# Altium PCB PCB1.PcbDoc
Units mm, origin at the board's own origin, x right, y up, seen from the top; angles counter-clockwise.
Board outline 71 x 55 mm, 2 copper layers (Top Layer, Bottom Layer); 14 components, 33 nets, 93 pads, 7 vias.
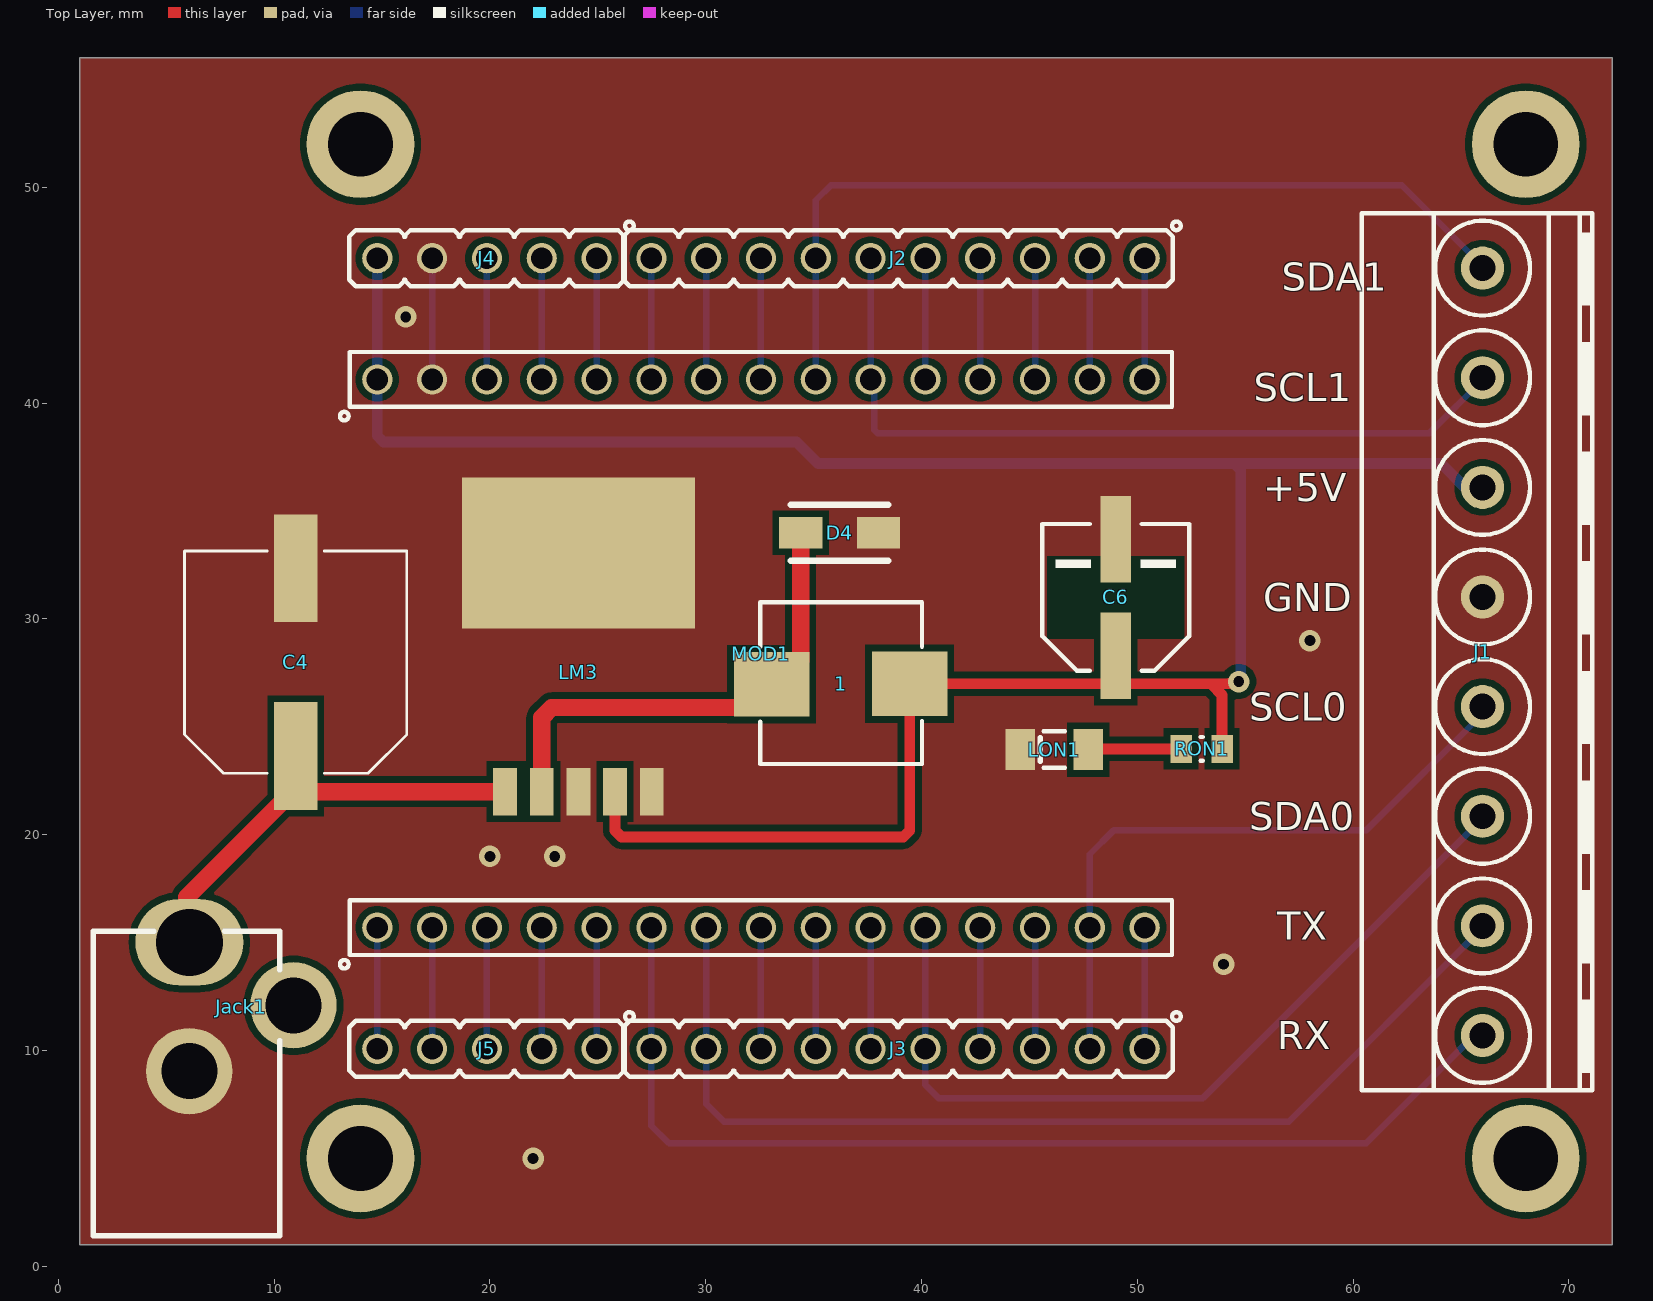
[diagram p0: Top Layer view]
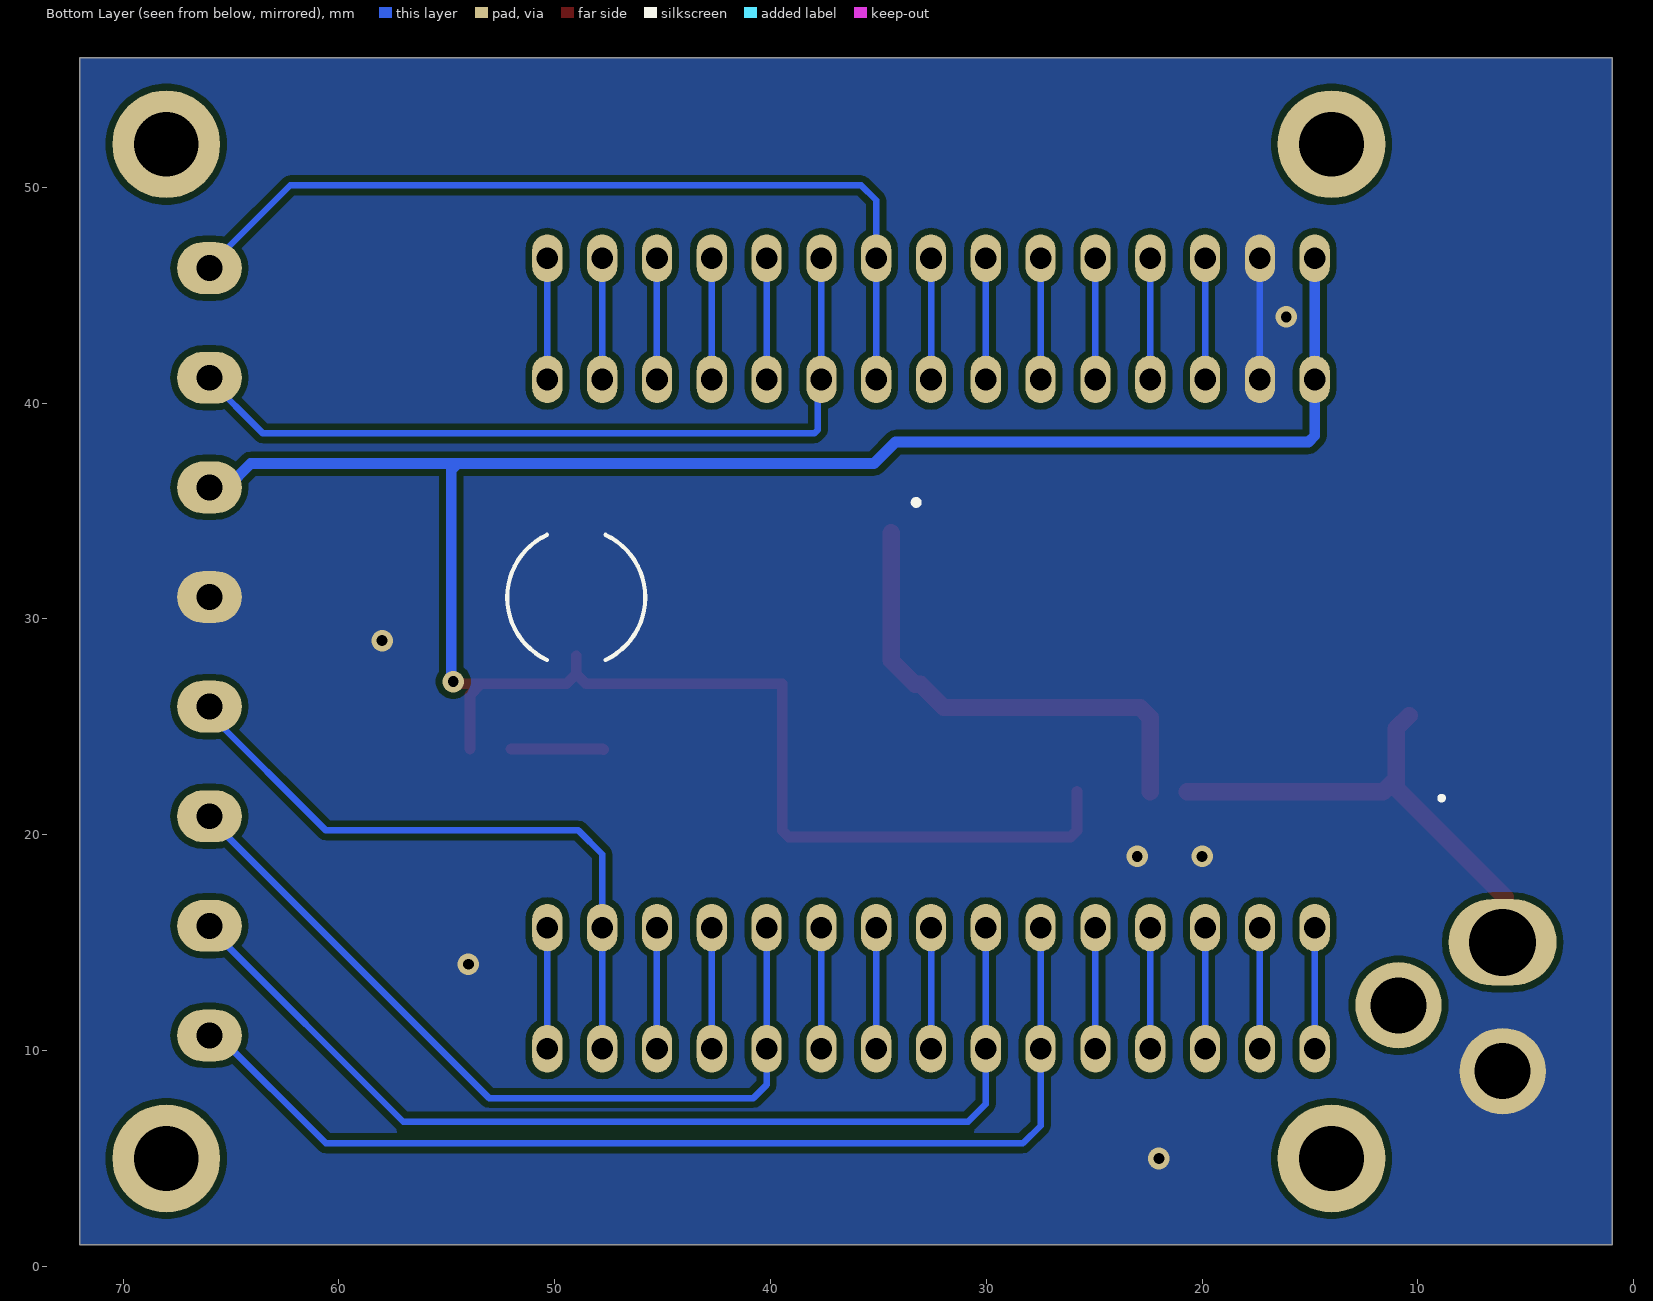
[diagram p1: Bottom Layer view, seen from below]

## Layer stack, top to bottom
Top Solder: solder mask 0.0102, Solder Resist, Dk 3.5
Top Layer: signal copper 0.0356
Dielectric 1: dielectric 0.32, FR-4, Dk 4.8
Bottom Layer: signal copper 0.0356
Bottom Solder: solder mask 0.0102, Solder Resist, Dk 3.5

## Board outline
1,1 1,56 72,56 72,1

## Design rules (kind name [scope] priority, off if disabled: settings)
Clearance [All] p1: gap=0.3 ignorepadtopadclearanceinfootprint=FALSE except(0: Arc-Hole Track-Hole SMDPad-Hole THPad-Hole Via-Hole Fill-Hole Poly-Hole Region-Hole Text-Hole)
PolygonConnect [InNet('GND')] p1: connectstyle=Direct reliefconductorwidth=0.254 reliefentries=4 polygonreliefangle="90 Angle" airgapwidth=0.254
RoutingVias [All] p1: holewidth=0.711 width=1.27 viastyle="Through Hole" minholewidth=0.711 minwidth=1.27 maxholewidth=0.711 maxwidth=1.27
SolderMaskExpansion [All] p1: expansion=0.102 istentingtop=FALSE
Width [All] p1: maxlimit=0.8 minlimit=0.3 preferedwidth=0.5
30 further rules are at their usual default settings.

## Components (designator, comment, footprint, x,y, rotation, side; value= is the part's Value field where it differs from the comment)
1 "Inductor b1" CYH74-33UH 36.3,27 r180 top value=33uH
C4 "=VALUE" CAP_EEEFK1E681SP 11,28 r90 top
C6 "=VALUE" RVT220UF16V67RV0015 49,31 r90 top
D4 "Diodo Schottky" DO-214AC-2 36.2,34 r0 top
J1 "CONN_TB8" TBG_8 66,28.48 r270 top
J2 "HDR1X10" HDR_M_1X10 38.91,46.72 r180 top value=?
J3 "HDR1X10" HDR_M_1X10 38.91,10.08 r180 top value=?
J4 "HDR1X5" HDR_M_1X5 19.86,46.72 r180 top value=?
J5 "HDR1X5" HDR_M_1X5 19.86,10.08 r180 top value=?
Jack1 "Conector" "Conector JACK" 6.6,8.6 r90 top
LM3 "LM2596" LM2596 20.7,22 r90 top
LON1 "Led1206" LED1206 46,24 r180 top
MOD1 "ESP32 DEVKITV1" HDR_F_1X15 32.56,41.1 r270 top
RON1 "Res 5k" "RES 0805 - 5k" 53,24 r0 top

## Footprints (in the part's own frame and the unit in brackets; to place one, negate y for a bottom-side part, rotate by r counter-clockwise, add the part's x,y. Pads: shape width x height; smd on the part's side, far side on the other; paste and mask are expansions set on the pad)
CAP_EEEFK1E681SP [mm]
  rect 5x2 smd: 1(-4.35,0) 2(4.35,0)
  silkscreen extent -5.15,-5.15 5.15,5.15, body extent -5.85,-5.15 5.85,5.15, height 9.3
"Conector JACK" [mm]
  oval 4x5 hole 3.1: 1(6.417,0.531)
  round 4 hole 2.6: 2(0.448,0.531) 3(3.496,-4.295)
  silkscreen extent -7.17,-3.66 6.93,4.98, body extent -7.26,-4.47 7.14,5.03, height 11
CYH74-33UH [mm]
  rect 3.5x3 smd: 1(3.25,0.02) 2(-3.15,0)
  silkscreen extent -3.72,-3.78 3.78,3.72, body extent -3.82,-3.78 3.88,3.72, height 4.6
DO-214AC-2 [mm]
  rect 2x1.45 smd: 1(-1.8,0) 2(1.8,0)
  silkscreen extent -2.25,-1.3 2.25,1.3, body extent -2.47,-1.3 2.47,1.3, height 2
HDR_F_1X15 [mm] "Connector; Header; 15 Position"
  round 1.4 / inner round 1.4 / far side oval 2.2x1.4 hole 1: 1(0,17.78) 2(0,15.24) 3(0,12.7) 4(0,10.16) 5(0,7.62) 6(0,5.08) 7(0,2.54) 8(0,0) 9(0,-2.54) 10(0,-5.08) 11(0,-7.62) 12(0,-10.16) 13(0,-12.7) 14(0,-15.24) 15(0,-17.78) 16(25.4,-17.78) 17(25.4,-15.24) 18(25.4,-12.7) 19(25.4,-10.16) 20(25.4,-7.62) 21(25.4,-5.08) 22(25.4,-2.54) 23(25.4,0) 24(25.4,2.54) 25(25.4,5.08) 26(25.4,7.62) 27(25.4,10.16) 28(25.4,12.7) 29(25.4,15.24) 30(25.4,17.78)
  silkscreen extent -1.27,-19.51 27.3,19.05, body extent -1.4,-27.55 26.75,23.95, height 15.47
HDR_M_1X5 [mm] "Connector; Header; 5 Position"
  round 1.4 / inner round 1.4 / far side oval 1.4x2.2 hole 1 mask+0.1: 1(-5.08,0) 2(-2.54,0) 3(0,0) 4(2.54,0) 5(5.08,0)
  silkscreen extent -6.8,-1.7 6.38,1.3, body extent -6.35,-1.27 6.35,1.27, height 8.54
HDR_M_1X10 [mm] "Connector; Header; 10 Position"
  round 1.4 / inner round 1.4 / far side oval 1.4x2.2 hole 1 mask+0.1: 1(-11.43,0) 2(-8.89,0) 3(-6.35,0) 4(-3.81,0) 5(-1.27,0) 6(1.27,0) 7(3.81,0) 8(6.35,0) 9(8.89,0) 10(11.43,0)
  silkscreen extent -13.1,-1.7 12.73,1.3, body extent -12.7,-1.3 12.7,1.19, height 8.54
LED1206 [mm]
  rect 1.35x1.9 smd: 1(-1.725,0.05) 2(1.425,0.05)
  silkscreen extent -0.65,-0.8 0.5,0.9, body extent -1.85,-0.85 1.55,0.95, height 1.1
LM2596 [mm]
  rect 2.2x1.1 smd: 1(0,0) 2(0,-1.7) 3(0,-3.4) 4(0,-5.1) 5(0,-6.8)
  rect 7x10.8 smd: 3(11.05,-3.4)
  body extent 0.23,-8.61 14.6,1.81, height 4.65
"RES 0805 - 5k" [mm]
  rect 1x1.3 smd: 1(-0.973,-0.019) 2(0.927,-0.019)
  silkscreen extent -0.07,-0.57 0.03,0.53, body extent -1.01,-0.62 0.99,0.58, height 0.46
RVT220UF16V67RV0015 [mm]
  rect 4x1.4 smd: 1(-2.7,0) 2(2.7,0)
  Top Layer pour cut-out: 1.905,3.175 1.905,-3.175 -1.905,-3.175 -1.905,3.175
  silkscreen extent -3.4,-3.4 3.4,3.4, body extent -3.65,-3.3 3.65,3.3, height 7.7
TBG_8 [mm] "Terminal Block Green"
  round 2 / inner round 2 / far side oval 2.4x3 hole 1.2: 1(-17.78,0) 2(-12.7,0) 3(-7.62,0) 4(-2.54,0) 5(2.54,0) 6(7.62,0) 7(12.7,0) 8(17.78,0)
  silkscreen extent -20.32,-5.6 20.32,5.08, body extent -20.24,-5.5 20.2,5, height 14.1

## Part data
1: library part Inductor, "Inductor", Code_IEC=1005, Code_JEITA=0402, LatestRevisionDate=29-May-2009, LatestRevisionNote="IPC-7351 Footprint Added.", PackageDescription="Chip Inductor", PackageReference=0402-A, Published=8-Jun-2000, Publisher="Altium Limited"
C4: library part CAP_SMD_EL_330u25V, "Capacitor;  Alum Electrolytic;  Cap 330 uF;  Tol 20%;  Vol-Rtg 25 VDC;  SMT;  8x10.5;  CT", Capacitance=680uF, Case/Package=Radial, Leakage Current=3uA, Manufacturer=Panasonic, Manufacturer Part Number=EEE-1EA331UP, Max Operating Temperature=85°C, Min Operating Temperature=-40°C, Package Quantity=1, Ripple Current=270mA, Tolerance=20%, Voltage=25V, Category="Aluminum Electrolytic Capacitors", ComponentLink1Description=https://datasheet.ciiva.com/24070/aba0000ce2-40801-24070005.pdf?src-supplier=Mouser, ComponentLink1URL=https://datasheet.ciiva.com/24070/aba0000ce2-40801-24070005.pdf?src-supplier=Mouser, ComponentLink2Description=https://datasheet.ciiva.com/46378/aba0000ce2-46378294.pdf?src-supplier=Element14, ComponentLink2URL=https://datasheet.ciiva.com/46378/aba0000ce2-46378294.pdf?src-supplier=Element14, ComponentLink3Description=https://datasheet.ciiva.com/30071/11aba0000ce2-30071959.pdf?src-supplier=Onlinecomponents.com, ComponentLink3URL=https://datasheet.ciiva.com/30071/11aba0000ce2-30071959.pdf?src-supplier=Onlinecomponents.com, ComponentLink4Description=https://datasheet.ciiva.com/31414/aba0000ce2-31414664.pdf?src-supplier=Farnell, ComponentLink4URL=https://datasheet.ciiva.com/31414/aba0000ce2-31414664.pdf?src-supplier=Farnell, ComponentLink5Description=https://datasheet.ciiva.com/46374/aba0000ce2-46374392.pdf?src-supplier=Element14, ComponentLink5URL=https://datasheet.ciiva.com/46374/aba0000ce2-46374392.pdf?src-supplier=Element14, ComponentLink6Description=https://datasheet.ciiva.com/16397/aba0000ce2-16397068.pdf?src-supplier=Future+Electronics, ComponentLink6URL=https://datasheet.ciiva.com/16397/aba0000ce2-16397068.pdf?src-supplier=Future+Electronics, ComponentLink7Description=https://datasheet.ciiva.com/17535/aba0000ce2-17535308.pdf?src-supplier=Avnet+Europe, ComponentLink7URL=https://datasheet.ciiva.com/17535/aba0000ce2-17535308.pdf?src-supplier=Avnet+Europe, ComponentLink8Description=https://datasheet.ciiva.com/2985/aba0000ce2-2985133.pdf?src-supplier=Avnet, ComponentLink8URL=https://datasheet.ciiva.com/2985/aba0000ce2-2985133.pdf?src-supplier=Avnet, ComponentLink9Description=https://datasheet.ciiva.com/14610/70255710-14610287.pdf?src-supplier=Allied+Electronics, ComponentLink9URL=https://datasheet.ciiva.com/14610/70255710-14610287.pdf?src-supplier=Allied+Electronics, Contact Plating=Tin, Diameter=8mm, Height=10.2mm, Height - Seated (Max)=0.402inch, Lead Free="Lead Free", Length=10.5mm, Life (Hours)=2000Hour, Mount="Surface Mount,PCB", Packaging="Tape and Reel", Pricing 1="500=0.19230, 1000=0.14820, 2500=0.14670, 10000=0.14520, 25000=0.14380, 50000=0.14230 (USD)", Radiation Hardening=No, REACH SVHC="No SVHC", Ripple Current (AC)=270mA, RoHS=Yes, Stock 1=7000, Supplier 1="Arrow Electronics", Supplier Part Number 1=EEE-1EA331UP, Termination=SMD/SMT, Voltage Rating=25V, Voltage Rating (DC)=25V
C6: library part CAP_SMD_EL_330u25V, "Capacitor;  Alum Electrolytic;  Cap 330 uF;  Tol 20%;  Vol-Rtg 25 VDC;  SMT;  8x10.5;  CT", Capacitance=220uF, Case/Package=Radial, Leakage Current=3uA, Manufacturer=Panasonic, Manufacturer Part Number=EEE-1EA331UP, Max Operating Temperature=85°C, Min Operating Temperature=-40°C, Package Quantity=1, Ripple Current=270mA, Tolerance=20%, Voltage=25V, Category="Aluminum Electrolytic Capacitors", ComponentLink1Description=https://datasheet.ciiva.com/24070/aba0000ce2-40801-24070005.pdf?src-supplier=Mouser, ComponentLink1URL=https://datasheet.ciiva.com/24070/aba0000ce2-40801-24070005.pdf?src-supplier=Mouser, ComponentLink2Description=https://datasheet.ciiva.com/46378/aba0000ce2-46378294.pdf?src-supplier=Element14, ComponentLink2URL=https://datasheet.ciiva.com/46378/aba0000ce2-46378294.pdf?src-supplier=Element14, ComponentLink3Description=https://datasheet.ciiva.com/30071/11aba0000ce2-30071959.pdf?src-supplier=Onlinecomponents.com, ComponentLink3URL=https://datasheet.ciiva.com/30071/11aba0000ce2-30071959.pdf?src-supplier=Onlinecomponents.com, ComponentLink4Description=https://datasheet.ciiva.com/31414/aba0000ce2-31414664.pdf?src-supplier=Farnell, ComponentLink4URL=https://datasheet.ciiva.com/31414/aba0000ce2-31414664.pdf?src-supplier=Farnell, ComponentLink5Description=https://datasheet.ciiva.com/46374/aba0000ce2-46374392.pdf?src-supplier=Element14, ComponentLink5URL=https://datasheet.ciiva.com/46374/aba0000ce2-46374392.pdf?src-supplier=Element14, ComponentLink6Description=https://datasheet.ciiva.com/16397/aba0000ce2-16397068.pdf?src-supplier=Future+Electronics, ComponentLink6URL=https://datasheet.ciiva.com/16397/aba0000ce2-16397068.pdf?src-supplier=Future+Electronics, ComponentLink7Description=https://datasheet.ciiva.com/17535/aba0000ce2-17535308.pdf?src-supplier=Avnet+Europe, ComponentLink7URL=https://datasheet.ciiva.com/17535/aba0000ce2-17535308.pdf?src-supplier=Avnet+Europe, ComponentLink8Description=https://datasheet.ciiva.com/2985/aba0000ce2-2985133.pdf?src-supplier=Avnet, ComponentLink8URL=https://datasheet.ciiva.com/2985/aba0000ce2-2985133.pdf?src-supplier=Avnet, ComponentLink9Description=https://datasheet.ciiva.com/14610/70255710-14610287.pdf?src-supplier=Allied+Electronics, ComponentLink9URL=https://datasheet.ciiva.com/14610/70255710-14610287.pdf?src-supplier=Allied+Electronics, Contact Plating=Tin, Diameter=8mm, Height=10.2mm, Height - Seated (Max)=0.402inch, Lead Free="Lead Free", Length=10.5mm, Life (Hours)=2000Hour, Mount="Surface Mount,PCB", Packaging="Tape and Reel", Pricing 1="500=0.19230, 1000=0.14820, 2500=0.14670, 10000=0.14520, 25000=0.14380, 50000=0.14230 (USD)", Radiation Hardening=No, REACH SVHC="No SVHC", Ripple Current (AC)=270mA, RoHS=Yes, Stock 1=7000, Supplier 1="Arrow Electronics", Supplier Part Number 1=EEE-1EA331UP, Termination=SMD/SMT, Voltage Rating=25V, Voltage Rating (DC)=25V
J1: library part "Bloque Terminal 8", "CONN, TERMINAL BLOCK, 5.08mm pitch"
J2 J3: library part "Header Male THT 1x10", "CONN, HEADER, Male, pitch: 2.54mm, 10POS", Manufacturer=?, Huella=?, Link_Supplier=?, Manufacturer Part=?, Price=?, Supplier=?, Supplier Part=?
J4 J5: library part "Header Male THT 1x5", "CONN, HEADER, Male, pitch: 2.54mm, 5POS", Manufacturer=?, Huella=?, Link_Supplier=?, Manufacturer Part=?, Price=?, Supplier=?, Supplier Part=?
LON1: "NCD1206R1"
RON1: "ARG05DTC5001"

## Free pads (board coordinates)
  round 5 hole 3: 27(14,5) 27(14,52) 27(68,5) 27(68,52)

## Via types
v1: diameter 1, hole 0.5, Top Layer to Bottom Layer, 7 vias

## Nets (pads, with @x,y where several pads share a name; then routed paths per layer and width w, separated by ;. In a path a pad name is that pad's centre, name@x,y a point inside that pad or via, vN(x,y) a via of type N, cw(c..) or ccw(c..) an arc to the next point about the centre after c; other vN are vias at no path point)
+5v: 1.2 C6.1 J1.3 J4.5 LM3.4 MOD1.15 RON1.2 | length 112.9
  Top Layer w0.5: LM3.4 25.8,20.193 26.093,19.9 39.157,19.9 39.45,20.193 1.2 48.55,27 C6.1@49,27.45 ; C6.1 C6.1@49,27.45 ; C6.1@49.415,27.035 C6.1@49,27.45 ; C6.1@49.45,27 54.246,27 54.251,27.004 54.604,27.004 v1(54.7,27.1) ; 53.457,26.95 53.927,26.48 RON1.2
  Bottom Layer w0.5: J4.5@14.719,46.781 J4.5 MOD1.15 14.78,38.493 15.073,38.2 34.2,38.2 35.2,37.2 54.503,37.2 ; v1(54.7,27.1) 54.796,27.196 54.796,36.907 54.503,37.2 ; J1.3 65.186,36.1 64.086,37.2 54.503,37.2
GND: C4.2 C6.2 D4.2 J1.4 J4.4 Jack1.2 LM3.3 LM3.5 LON1.2 MOD1.14 | length 5.6
  Bottom Layer w0.3: MOD1.14 J4.4
  other v1: 22,5 54,14 20,19 23,19 58,29 16.1,44
Net1_1: 1.1 D4.1 LM3.2 | length 22.4
  Top Layer w0.8: LM3.2 22.4,25.431 22.869,25.9 31.97,25.9 1.1 33.3,26.98 34.4,28.08 D4.1
NetC4_1: C4.1 Jack1.1 LM3.1 | length 22.9
  Top Layer w0.8: Jack1.1 5.95,15.136 5.95,17.1 11,22.15 C4.1@11,22.6 ; C4.1@10.4,25.531 11,24.931 C4.1 C4.1@11,22.6 ; LM3.1 11.6,22 C4.1@11,22.6
NetJ2_1: J2.1 MOD1.1 | length 5.6
  Bottom Layer w0.3: MOD1.1 J2.1
NetJ2_2: J2.2 MOD1.2 | length 5.6
  Bottom Layer w0.3: MOD1.2 J2.2
NetJ2_3: J2.3 MOD1.3 | length 5.6
  Bottom Layer w0.3: MOD1.3 J2.3
NetJ2_4: J2.4 MOD1.4 | length 5.6
  Bottom Layer w0.3: MOD1.4 J2.4
NetJ2_5: J2.5 MOD1.5 | length 5.6
  Bottom Layer w0.3: MOD1.5 J2.5
NetJ2_8: J2.8 MOD1.8 | length 5.6
  Bottom Layer w0.3: MOD1.8 J2.8
NetJ2_9: J2.9 MOD1.9 | length 5.6
  Bottom Layer w0.3: MOD1.9 J2.9
NetJ2_10: J2.10 MOD1.10 | length 5.6
  Bottom Layer w0.3: MOD1.10 J2.10
NetJ3_1: J3.1 MOD1.30 | length 5.6
  Bottom Layer w0.3: J3.1 MOD1.30
NetJ3_3: J3.3 MOD1.28 | length 5.6
  Bottom Layer w0.3: J3.3 MOD1.28
NetJ3_4: J3.4 MOD1.27 | length 5.6
  Bottom Layer w0.3: J3.4 MOD1.27
NetJ3_6: J3.6 MOD1.25 | length 5.6
  Bottom Layer w0.3: J3.6 MOD1.25
NetJ3_7: J3.7 MOD1.24 | length 5.6
  Bottom Layer w0.3: J3.7 MOD1.24
NetJ3_8: J3.8 MOD1.23 | length 5.6
  Bottom Layer w0.3: J3.8 MOD1.23
NetJ4_1: J4.1 MOD1.11 | length 5.6
  Bottom Layer w0.3: MOD1.11 J4.1
NetJ4_2: J4.2 MOD1.12 | length 5.6
  Bottom Layer w0.3: MOD1.12 J4.2
NetJ4_3: J4.3 MOD1.13 | length 5.6
  Bottom Layer w0.3: MOD1.13 J4.3
NetJ5_1: J5.1 MOD1.20 | length 5.6
  Bottom Layer w0.3: J5.1 MOD1.20
NetJ5_2: J5.2 MOD1.19 | length 5.6
  Bottom Layer w0.3: J5.2 MOD1.19
NetJ5_3: J5.3 MOD1.18 | length 5.6
  Bottom Layer w0.3: J5.3 MOD1.18
NetJ5_4: J5.4 MOD1.17 | length 5.6
  Bottom Layer w0.3: J5.4 MOD1.17
NetJ5_5: J5.5 MOD1.16 | length 5.6
  Bottom Layer w0.3: J5.5 MOD1.16
NetLON1_1: LON1.1 RON1.1 | length 4.3
  Top Layer w0.5: LON1.1 47.756,23.981 RON1.1
RX: J1.8 J3.10 MOD1.21 | length 50.1
  Bottom Layer w0.3: MOD1.21 J3.10 27.48,6.52 28.3,5.7 60.6,5.7 65.6,10.7 J1.8
SCL0: J1.5 J3.2 MOD1.29 | length 30.3
  Bottom Layer w0.3: J3.2 MOD1.29 47.8,19.1 48.9,20.2 60.6,20.2 66.1,25.7 J1.5@66.1,25.94
SCL1: J1.2 J2.6 MOD1.6 | length 37.5
  Bottom Layer w0.3: J2.6 MOD1.6 37.8,40.94 37.8,38.776 37.976,38.6 63.52,38.6 J1.2@66.1,41.18
SDA0: J1.6 J3.5 MOD1.26 | length 38.8
  Bottom Layer w0.3: MOD1.26 J3.5 40.18,8.409 40.789,7.8 53.04,7.8 66,20.76 J1.6
SDA1: J1.1 J2.7 MOD1.7 | length 41.2
  Bottom Layer w0.3: MOD1.7 J2.7 35.1,49.4 35.8,50.1 62.26,50.1 J1.1@66.1,46.26
TX: J1.7 J3.9 MOD1.22 | length 48.3
  Bottom Layer w0.3: MOD1.22 J3.9 30.02,7.523 30.843,6.7 57.02,6.7 66,15.68 J1.7
pads on no net: Jack1.3

## Polygon pours and split planes (outlines as drawn)
GND on Bottom Layer "GND_L02_P001" (solid, remove dead copper, pour order 1): 1,1 1,56 72,56 72,1
GND on Top Layer "GND_L01_P000" (solid, remove dead copper, pour order 0): 1,1 1,56 72,56 72,1

## Silkscreen, mask and mechanical layers (free items; w line width, h text height)
Top Overlay:
  text "SDA1" at 56.7,45.2 h1.3
  text "SCL1" at 55.4,40.1 h1.3
  text "+5V" at 55.833,35.45 h1.3
  text "GND" at 55.833,30.37 h1.3
  text "SCL0" at 55.183,25.29 h1.3
  text "SDA0" at 55.183,20.21 h1.3
  text "TX" at 56.483,15.13 h1.3
  text "RX" at 56.483,10.05 h1.3
Mechanical 1:
  the board outline again, w0.3

## Dimensions
1,1 to 72,1 on Top Overlay
1,56 to 1,1 on Top Overlay